# Altium PCB PCB2.PcbDoc
Units mm, origin at the board's own origin, x right, y up, seen from the top; angles counter-clockwise.
Board outline 84.6 x 40.6 mm, 2 copper layers (Top Layer, Bottom Layer), stack 1.571 mm thick; 85 components, 67 nets, 363 pads, 12 vias.
Unrouted connection lines stored in the file: 4.
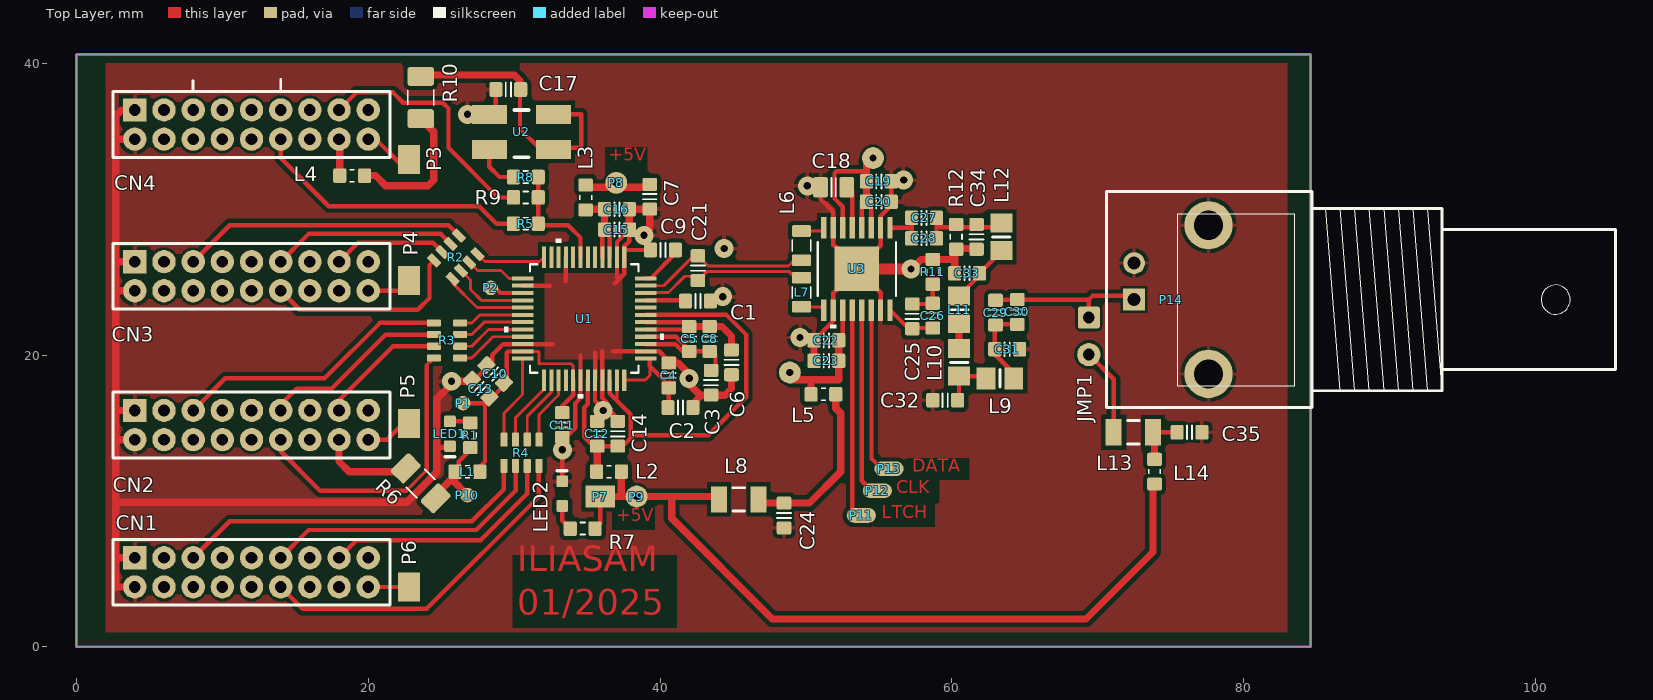
[diagram p0: Top Layer view]
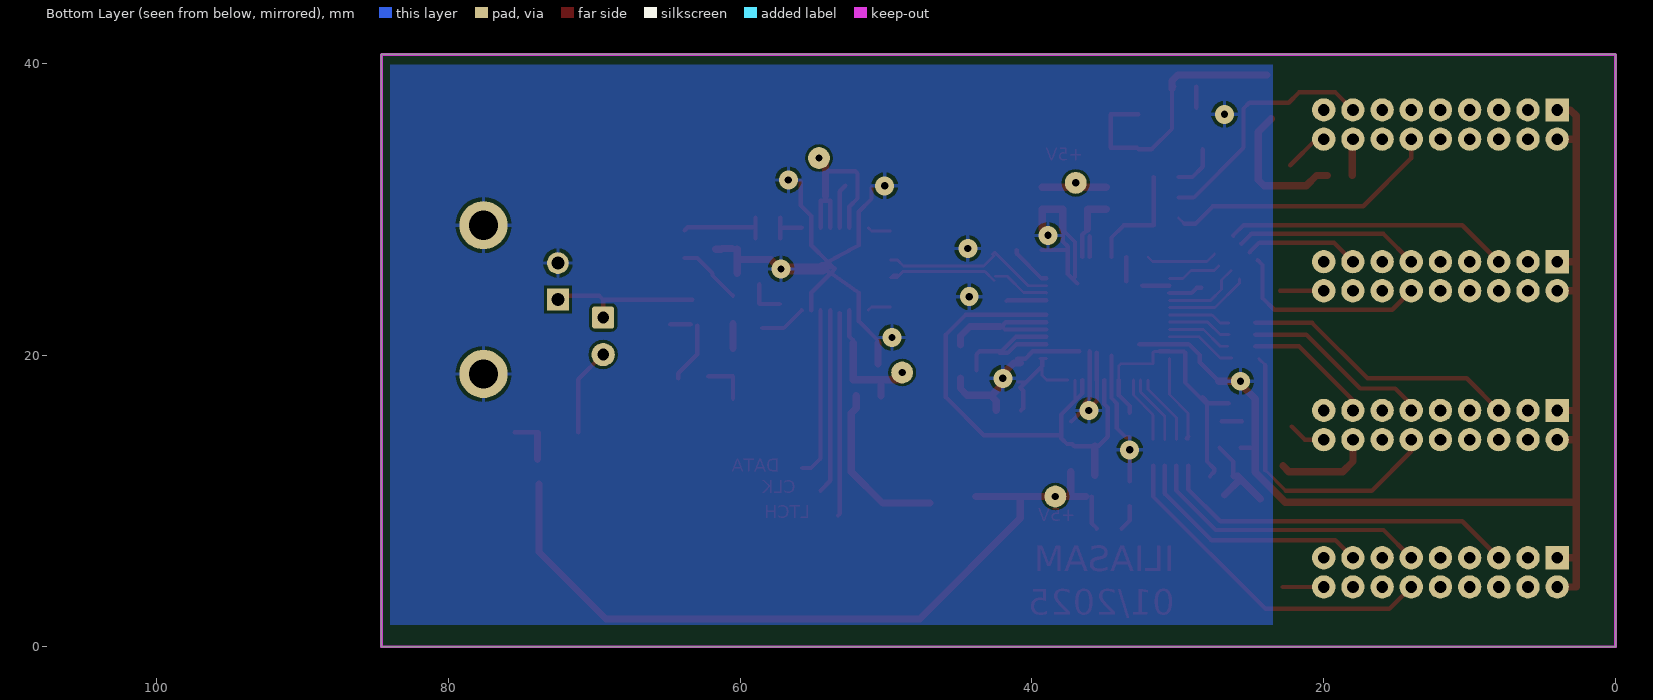
[diagram p1: Bottom Layer view, seen from below]
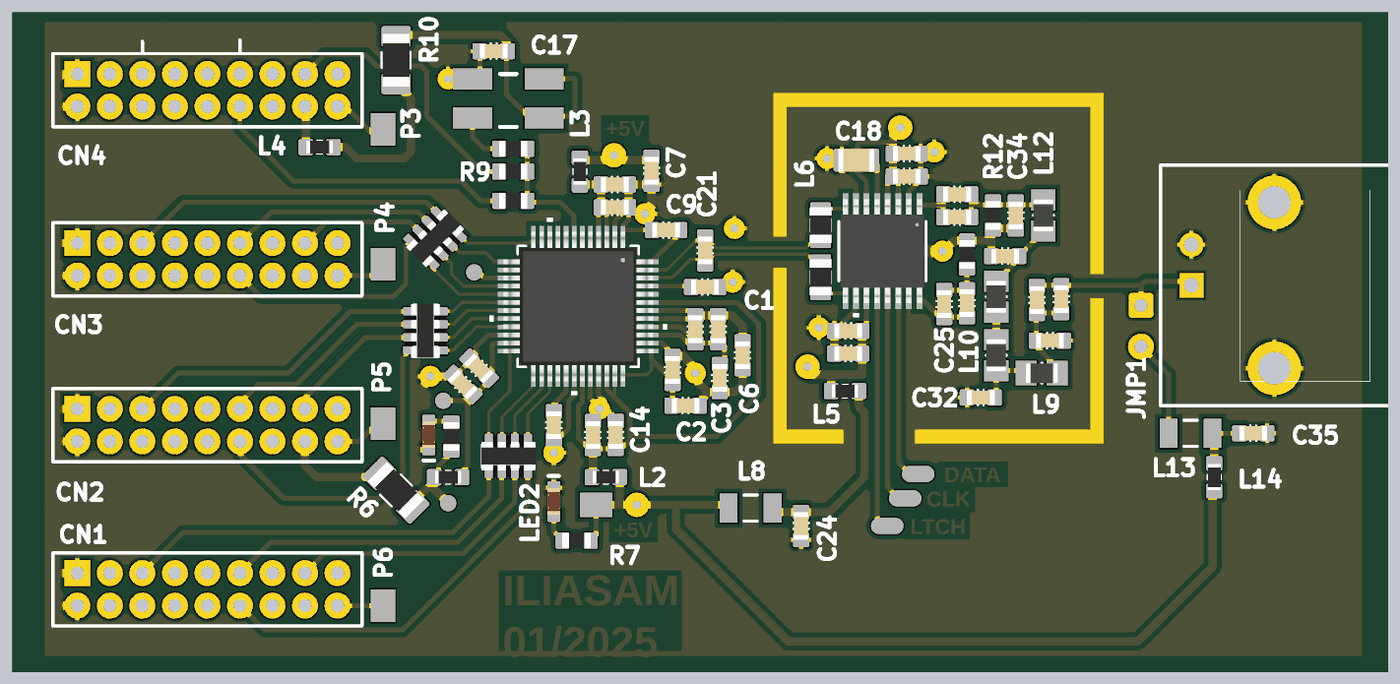
[diagram p2: 3D render of the assembled board from above, using the file's embedded part models]

## Layer stack, top to bottom
Top Solder: solder mask 0.0102, Solder Resist, Dk 3.5
Top Layer: signal copper 0.0356
Dielectric 1: dielectric 1.5, FR-4, Dk 4.8
Bottom Layer: signal copper 0.0356
Bottom Solder: solder mask 0.0102, Solder Resist, Dk 3.5

## Board outline
0,0 84.6,0 84.6,40.6 0,40.6

## Design rules (kind name [scope] priority, off if disabled: settings)
Clearance Clearance_1 [InNamedPolygon('GND3') vs OnLayer('Top Layer')] p1: gap=0.3
Clearance [All] p2: gap=0.19
HoleSize [All] p1: absolutevalues=TRUE maxlimit=5 minlimit=0.025 maxpercent=80.000 minpercent=20.000
PolygonConnect [All] p1: connectstyle=Relief reliefconductorwidth=0.254 reliefentries=4 polygonreliefangle="90 Angle" airgapwidth=0.254
RoomDefinition Sheet1 [InComponentClass('Sheet1')] p1: confinementstyle=ConfineIn formatcopy=TRUE lockcomponents=FALSE outline 125.643,-16.916 290.87,-16.916 290.87,89.129 125.643,89.129
RoutingVias [All] p1: holewidth=0.5 width=1.3 viastyle="Through Hole" minholewidth=0.5 minwidth=0.8 maxholewidth=1 maxwidth=5
SolderMaskExpansion [All] p1: expansion=0.102
Width [All] p1: maxlimit=1 minlimit=0.2 preferedwidth=0.3
29 further rules are at their usual default settings.

## Components (designator, comment, footprint, x,y, rotation, side; value= is the part's Value field where it differs from the comment)
C1 "100nF" CAPC1608X90N 42.6,23.7 r180 top
C2 "10uF" CAPC1608X90N 41.4,16.4 r180 top
C3 "100nF" CAPC1608X90N 43.5,18.1 r90 top
C4 "100nF" CAPC1608X90N 40.6,18.6 r270 top
C5 "10uF" CAPC1608X90N 42,21.1 r270 top
C6 "100nF" CAPC1608X90N 44.9,19.5 r90 top
C7 "100nF" CAPC1608X90N 39.3,30.85 r90 top
C8 "100nF" CAPC1608X90N 43.4,21.1 r270 top
C9 "100nF" CAPC1608X90N 40.2,27.2 r0 top
C10 "100nF" CAPC1608X90N 28.7,18.7 r315 top
C11 "100nF" CAPC1608X90N 33.3,15.2 r90 top
C12 "100nF" CAPC1608X90N 35.7,14.6 r270 top
C13 "10nF" CAPC1608X90N 27.7,17.7 r315 top
C14 "10uF" CAPC1608X90N 37.1,14.6 r270 top
C15 "10uF" CAPC1608X90N 37.05,28.6 r180 top
C16 "100nF" CAPC1608X90N 37.05,30 r180 top
C17 "100nF" CAPC1608X90N 29.6,38.2 r0 top
C18 "100nF" CAPC2012X135N 51.9,31.5 r0 top
C19 "100nF" CAPC1608X90N 55,31.9 r180 top
C20 "100pF" CAPC1608X90N 55,30.5 r180 top
C21 "100pF" CAPC1608X90N 42.6,25.95 r90 top
C22 "100pF" CAPC1608X90N 51.4,21 r0 top
C23 "100nF" CAPC1608X90N 51.4,19.6 r0 top
C24 "1uF" CAPC1608X90N 48.5,9 r90 top
C25 "470nF" CAPC1608X90N 57.3,22.65 r90 top
C26 "1nF" CAPC1608X90N 58.7,22.7 r90 top
C27 "1nF" CAPC1608X90N 58.1,29.4 r0 top
C28 "470nF" CAPC1608X90N 58.1,28 r0 top
C29 "470nF" CAPC1608X90N 63,22.9 r90 top
C30 "1nF" CAPC1608X90N 64.5,22.95 r90 top
C31 "56pF" CAPC1608X90N 63.8,20.4 r180 top
C32 "160pF" CAPC1608X90N 59.55,16.9 r0 top
C33 "160pF" CAPC1608X90N 61.05,25.6 r0 top
C34 "56pF" CAPC1608X90N 61.7,28.1 r90 top
C35 "100nF" CAPC1608X90N 76.3,14.7 r180 top
CN1 "S9_conn" CONN9_2 4,4.1 r0 top locked
CN2 "S9_conn" CONN9_2 4,14.2 r0 top locked
CN3 "S9_conn" CONN9_2 4,24.4 r0 top locked
CN4 "S9_conn" CONN9_2 4,34.8 r0 top locked
JMP1 "PLS-2" HDR_1x2 69.4,21.3 r0 top
L1 "BEAD" INDC1608N 26.8,12 r0 top
L2 "BEAD" INDC1608N 36.5,12 r180 top
L3 "BEAD" INDC1608N 34.9,30.8 r270 top
L4 "BEAD" INDC1608N 18.9,32.3 r0 top
L5 "BEAD" INDC1608N 51.2,17.3 r180 top
L6 "Inductor" RESC2012X70N 49.7,27.5 r270 top
L7 "Inductor" RESC2012X70N 49.7,24.3 r90 top
L8 "Inductor" INDC3216 45.4,10.1 r0 top
L9 "Inductor" V0805HD 63.3,18.4 r180 top
L10 "Inductor" V0805HD 60.5,19.5 r90 top
L11 "Inductor" V0805HD 60.5,23.1 r90 top
L12 "Inductor" V0805HD 63.4,28.1 r90 top
L13 "Inductor" INDC3216 72.45,14.7 r0 top
L14 "BEAD" INDC1608N 73.9,12 r90 top
LED1 "LED" LED_0603 25.6,14.6 r270 top
LED2 "LED" LED_0603 33.3,10.5 r90 top
P1 "Pad" EXT_PAD_SMALL2 26.5,18.2 r0 top
P2 "Pad" EXT_PAD_SMALL2 28.4,26.1 r0 top
P3 "Pad" EXT_PAD_2 22.8,31.9 r180 top
P4 "Pad" EXT_PAD_2 22.8,23.6 r180 top
P5 "Pad" EXT_PAD_2 22.8,13.8 r180 top
P6 "Pad" EXT_PAD_2 22.8,5.6 r0 top
P7 "Pad" Ext_pad_2 34.4,10.3 r90 top
P8 "Pad" Ext_hole 37,31.8 r0 top
P9 "Pad" Ext_hole 38.4,10.3 r0 top
P10 "Pad" Ext_pad_small2#1 26.8,11.9 r0 top
P11 "Pad" Ext_pad_small2#2 52.3,9 r90 top
P12 "Pad" Ext_pad_small2#2 53.4,10.7 r90 top
P13 "Pad" Ext_pad_small2#2 54.2,12.2 r90 top
P14 "BNC" "BNC_RA CON" 72.5,23.8 r180 top
R1 "2K" RESC1608X55N 27,14.5 r90 top
R2 "56" RESCAXS50P160X320X70-8N 26,26.7 r135 top
R3 "56" RESCAXS50P160X320X70-8N 25.4,21 r180 top
R4 "56" RESCAXS50P160X320X70-8N 30.5,13.3 r270 top
R5 "NA" RESC1608X55N 30.8,29 r180 top
R6 "0" RESC3216N_ZERO 23.6,11.2 r315 top
R7 "2K" RESC1608X55N 34.7,8.1 r0 top
R8 "NA" RESC1608X55N 30.8,32.2 r180 top
R9 "0" RESC1608X55N 30.8,30.8 r180 top
R10 "0" RESC3216N_ZERO 23.6,37.65 r90 top
R11 "33" RESC1608X55N 58.7,25.7 r90 top
R12 "66" RESC1608X55N 60.3,28.1 r270 top
U1 "AD9226ASTZ" ST_48_ADI 34.8,22.5 r270 top
U2 "Quartz" "SX-6 QUARTZ" 30.5,35.3 r180 top
U3 "AD8370AREZ" RE_16_2_ADI 53.5,25.9 r270 top

## Footprints (in the part's own frame and the unit in brackets; to place one, negate y for a bottom-side part, rotate by r counter-clockwise, add the part's x,y. Pads: shape width x height; smd on the part's side, far side on the other; paste and mask are expansions set on the pad)
"BNC_RA CON" [mm] "Connector; BNC Elbow"
  rect 1.5x1.5 hole 0.9: 1(0,0)
  round 3.3 hole 2: 2(-5.1,5.1) 2(-5.1,-5.1)
  round 1.5 hole 0.9: 2(0,-2.5)
  silkscreen extent -33,-7.4 1.9,7.4
CAPC1608X90N [mm] "Chip Capacitor, Body 1.6x0.8mm, EIA 0603, IPC Medium Density"
  round 0.254 on Mech15: 0(0,0)
  rrect25% 0.9x1 smd: 1(-0.85,0) 2(0.85,0)
  Top Layer pour cut-out: -0.6,0.5 -0.4,0.7 0.4,0.7 0.6,0.5 0.6,-0.5 0.4,-0.7 -0.4,-0.7 -0.6,-0.5
  silkscreen extent -0.18,-0.48 0.18,0.48, body extent -0.85,-0.45 0.85,0.45, height 0.89
CAPC2012X135N [mm] "Chip Capacitor, Body 2.0x1.2mm, EIA 0805, IPC Medium Density"
  round 0.254 on Mech15: 0(0,0)
  rrect25% 1x1.4 smd: 1(-0.9,0) 2(0.9,0)
  Top Layer pour cut-out: -0.675,0.7 -0.475,0.9 0.475,0.9 0.675,0.7 0.675,-0.7 0.475,-0.9 -0.475,-0.9 -0.675,-0.7
  silkscreen extent -0.15,-0.65 0.15,0.65, body extent -1.1,-0.72 1.1,0.73, height 1.34
CONN9_2 [mm] "Connector 9x2, 2mm"
  rect 1.6x1.6 hole 0.8: 1(0,2)
  round 1.6 hole 0.8: 2(0,0) 3(2,2) 4(2,0) 5(4,2) 6(4,0) 7(6,2) 8(6,0) 9(8,2) 10(8,0) 11(10,2) 12(10,0) 13(12,2) 14(12,0) 15(14,2) 16(14,0) 17(16,2) 18(16,0)
  silkscreen extent -1.5,-1.25 17.5,3.25
Ext_hole [mm] "Hole for wire (0.6)"
  round 1.5 hole 0.5: 1(0,0)
EXT_PAD_2 [mm] "Pad for wire(1.5x2)"
  rect 1.5x2 smd: 1(0,-1.5)
Ext_pad_2 [mm] "Pad for wire(1.5x2)"
  rect 1.5x2 smd: 1(0,-1.5)
EXT_PAD_SMALL2 [mm] "Pad for wire(1mm round)"
  round 1 smd: 1(0,-1.5)
Ext_pad_small2#1 [mm] "Pad for wire(1mm round)"
  round 1 smd: 1(0,-1.5)
Ext_pad_small2#2 [mm] "Pad for wire(1mm round)"
  oval 1x2 smd: 1(0,-1.5)
HDR_1x2 [mm]
  rrect25% 1.524x1.524 hole 0.8: 1(0,1.27)
  round 1.6 hole 0.8: 2(0,-1.27)
  body extent -0.5,-0.51 0.51,0.51
INDC1608N [mm] "Chip bead, Body 1.6x0.8mm, 0603, IPC Medium Density"
  round 0.254 on Mech15: 0(0,0)
  rrect25% 0.9x1 smd: 1(-0.85,0) 2(0.85,0)
  Top Layer pour cut-out: -0.4,0.6 0.4,0.6 0.4,-0.6 -0.4,-0.6
  silkscreen extent -0.15,-0.41 0.15,0.41, body extent -0.8,-0.4 0.8,0.4, height 0.79
INDC3216 [mm] "Chip Inductor, Body 3.2x1.6mm, IPC High Density"
  rect 1.1x1.8 smd: 1(-1.35,0) 2(1.35,0)
  silkscreen extent -0.4,-0.8 0.4,0.8, body extent -1.7,-0.9 1.7,0.9, height 0.55
LED_0603 [mm] "LED_0603"
  round 0.254 on Mech15: 0(0,0)
  rrect25% 0.8x0.8 smd: 1(-0.85,0) 2(0.85,0)
  Top Layer pour cut-out: -0.5,0.5 0.5,0.5 0.5,-0.5 -0.5,-0.5
  silkscreen extent 1.58,-0.3 1.58,0.33, body extent -0.8,-0.4 0.8,0.4, height 0.75
RE_16_2_ADI [mil]
  rect 58x14 smd paste+0 mask+0: 1(-111,89.57) 2(-111,63.98) 3(-111,38.39) 4(-111,12.8) 5(-111,-12.8) 6(-111,-38.39) 7(-111,-63.98) 8(-111,-89.57) 9(111,-89.57) 10(111,-63.98) 11(111,-38.39) 12(111,-12.8) 13(111,12.8) 14(111,38.39) 15(111,63.98) 16(111,89.57)
  rect 120x120 smd paste-59.5 mask+0: EPAD(0,0)
  silkscreen extent -72,-106 160,106, body extent -126,-101 126,101, height 47
RESC1608X55N [mm] "Chip Resistor, Body 1.6x0.8mm, EIA 0603, IPC Medium Density"
  round 0.254 on Mech15: 0(0,0)
  rrect25% 0.9x1 smd: 1(-0.85,0) 2(0.85,0)
  Top Layer pour cut-out: -0.6,0.5 -0.4,0.7 0.4,0.7 0.6,0.5 0.6,-0.5 0.4,-0.7 -0.4,-0.7 -0.6,-0.5
  silkscreen extent -0.15,-0.41 0.15,0.41, body extent -0.87,-0.47 0.88,0.48, height 0.54
RESC2012X70N [mm] "Chip Resistor, Body 2.0x1.2mm, EIA 0805, IPC Medium Density"
  round 0.254 on Mech15: 0(0,0)
  rrect25% 0.8x1.3 smd: 1(-1,0) 2(1,0)
  Top Layer pour cut-out: -0.725,0.65 -0.525,0.85 0.525,0.85 0.725,0.65 0.725,-0.65 0.525,-0.85 -0.525,-0.85 -0.725,-0.65
  silkscreen extent -0.38,-0.64 0.38,0.64, body extent -1.1,-0.67 1.1,0.68, height 0.69
RESC3216N_ZERO [mm] "Chip Resistor, Body 3.2x1.6mm, 1206, IPC Medium Density"
  round 0.508 on Mech15: 0(0,0)
  rrect25% 1.3x1.8 smd: 1(-1.45,0) 2(1.45,0)
  silkscreen extent -0.51,-0.89 0.51,0.89, body extent -1.62,-0.82 1.63,0.83, height 0.69
RESCAXS50P160X320X70-8N [mm] "Resistor Pack, Body 1.6x3.2mm, 4x0603, IPC Medium Density"
  round 0.254 on Mech15: 0(0,0)
  rrect25% 0.95x0.5 smd: 1(-0.9,1.2) 2(-0.9,0.4) 3(-0.9,-0.4) 4(-0.9,-1.2) 5(0.9,-1.2) 6(0.9,-0.4) 7(0.9,0.4) 8(0.9,1.2)
  Top Layer pour cut-out: -0.4,1.7 0.4,1.7 0.4,-1.7 -0.4,-1.7
  body extent -0.87,-1.68 0.88,1.67, height 0.7
ST_48_ADI [mil]
  rect 58x11 smd paste+0 mask+0: 1(-166,108.27) 2(-166,88.58) 3(-166,68.9) 4(-166,49.21) 5(-166,29.53) 6(-166,9.84) 7(-166,-9.84) 8(-166,-29.53) 9(-166,-49.21) 10(-166,-68.9) 11(-166,-88.58) 12(-166,-108.27) 25(166,-108.27) 26(166,-88.58) 27(166,-68.9) 28(166,-49.21) 29(166,-29.53) 30(166,-9.84) 31(166,9.84) 32(166,29.53) 33(166,49.21) 34(166,68.9) 35(166,88.58) 36(166,108.27)
  rect 11x58 smd paste+0 mask+0: 13(-108.27,-166) 14(-88.58,-166) 15(-68.9,-166) 16(-49.21,-166) 17(-29.53,-166) 18(-9.84,-166) 19(9.84,-166) 20(29.53,-166) 21(49.21,-166) 22(68.9,-166) 23(88.58,-166) 24(108.27,-166) 37(108.27,166) 38(88.58,166) 39(68.9,166) 40(49.21,166) 41(29.53,166) 42(9.84,166) 43(-9.84,166) 44(-29.53,166) 45(-49.21,166) 46(-68.9,166) 47(-88.58,166) 48(-108.27,166)
  silkscreen extent -215,-215 215,215, body extent -181,-181 181,181, height 63
"SX-6 QUARTZ" [mm] "Quartz_SX-6 (SMD06035C4)"
  rect 2.4x1.3 smd: 1(-2.2,-1.2) 2(2.2,-1.2) 3(2.2,1.2) 4(-2.2,1.2)
  Top Layer pour cut-out: -3.594,1.3 -3.594,1.994 -3.594,2.094 3.6,2.094 3.6,0.3 3.6,-2.1 3.1,-2.1 1.9,-2.1 -3.594,-2.1 -3.594,-2
  silkscreen extent -0.5,-1.5 0.5,1.75, body extent -3,-1.75 3,1.75, height 1.2
V0805HD [mm]
  rect 1.3x1.5 smd: 1(-0.95,0) 2(0.95,0)
  silkscreen extent 0,-0.6 0,0.6, body extent -1,-0.62 1,0.63, height 1.2

## Part data
C1 C2 C3 C4 C5 C6 C7 C8 C9 C10 C11 C12 C13 C14 C15 C16 C17 C18 C19 C20 C21 C22 C23 C24 C25 C26 C27 C28 C29 C30 C31 C32 C33 C34 C35: library part CC0805, "Chip capacitor"
JMP1: library part JMP2, "Jumper"
L1 L2 L3 L4 L5 L14: "Ferrit Bead"
LED1 LED2: library part LED_0603, "LED_0603"
P1 P2 P3 P4 P5 P6 P7 P8 P9 P10 P11 P12 P13: library part "Ext Pad", "Pad for wire"
P14: "BNC Elbow Connector"
R1 R5 R6 R7 R8 R9 R10 R11 R12: library part RC0805, "Chip resistor"
R2 R3 R4: library part res_array_inv, "SMT Resistor Array"
U1 U3: "No Description Available"
U2: library part "Quartz Osc", "Quartz Osc"

## Free pads (board coordinates)
  round 1.5 hole 0.5: 2(48.9,18.8) 3(54.6,33.5)

## Via types
v1: diameter 1.3, hole 0.5, Top Layer to Bottom Layer, 12 vias

## Nets (pads, with @x,y where several pads share a name; then routed paths per layer and width w, separated by ;. In a path a pad name is that pad's centre, name@x,y a point inside that pad or via, vN(x,y) a via of type N, cw(c..) or ccw(c..) an arc to the next point about the centre after c; other vN are vias at no path point)
ADC_CLK: R5.1 R8.1 R9.1 U1.7 | length 7.9
  Top Layer w0.2: R5.1@31.65,28.9 R5.1
  Top Layer w0.3: R5.1@31.65,28.9 33.7,28.9 34.55,28.05 U1.7 ; R5.1 R9.1 R8.1
AMP_IN: C27.2 C28.2 C34.2 L12.2 R12.1 | length 6.3
  Top Layer w0.3: C28.2 C27.2 ; 58.95,28.75 60.7,28.75 62.1,28.75 63.6,28.75 L12.2@63.8,28.55
AMP_VDD1: C19.2 C20.2 C22.2 C23.2 L5.2 pad.2 pad.3 U3.3 U3.4 U3.6 U3.11 | length 22.2
  Top Layer w0.3: C22.2 52.525,21.275 U3.11 ; U3.6 52.525,30.167 51.96,30.732 51.96,32.46 52.1,32.6 54.15,32.6 ; U3.4 53.825,30.575 54.475,30.575 U3.3
  Top Layer w0.5: pad.2@48.9,18.4 49,18.3 50.2,18.3 ; L5.2@50.35,17.2 50.35,18.15 50.2,18.3 ; C22.2@52.25,20.8 52.25,19.4 52.25,18.3 50.2,18.3 ; C20.2@54.15,30.9 C19.2 54.15,32.6 pad.3@54.15,33.3
ANT: C29.2 C30.2 JMP1.1 P14.1 | length 10.6
  Top Layer w0.3: C29.2@63.3,23.8 C30.2 69.4,23.8 ; JMP1.1 69.4,23.8 ; P14.1 72.25,24.05 69.65,24.05 69.4,23.8
CLCK: P12.1 U3.13 | length 12.7
  Top Layer w0.3: U3.13 53.825,11.375 P12.1@54.5,10.7
CLK_OUT: CN4.12 R5.2 | length 19.3
  Top Layer w0.2: R5.2@29.55,29 R5.2@29.95,29.4
  Top Layer w0.3: CN4.12 14,33.5 17.3,30.2 27.6,30.2 28.8,29 R5.2@29.55,29
CML: C1.2 U1.45 | length 2.8
  Top Layer w0.3: U1.45 41.7,23.75 C1.2
D0: CN3.5 R2.5 | length 19.5
  Top Layer w0.3: CN3.5 10.5,28.9 25.497,28.9 R2.5
D1: CN3.11 R2.6 | length 12.7
  Top Layer w0.3: CN3.11 15.9,28.3 24.966,28.3 R2.6
D2: CN3.15 R2.7 | length 7.9
  Top Layer w0.3: CN3.15 19.3,27.7 24.434,27.7 R2.7
D3: CN3.12 R2.8 | length 13.8
  Top Layer w0.3: CN3.12 15.3,23.1 23.4,23.1 24.2,23.9 24.2,26.173 R2.8
D4: CN2.5 R3.5 | length 19.2
  Top Layer w0.3: CN2.5 10.2,18.4 17,18.4 20.8,22.2 R3.5@24.7,22.2
D5: CN2.11 R3.6 | length 13.1
  Top Layer w0.3: CN2.11 14,16.6 15.1,17.7 17.5,17.7 21.2,21.4 R3.6@24.7,21.4
D6: CN2.15 R3.7 | length 8.9
  Top Layer w0.2: CN2.15 CN2.15@18,16.9
  Top Layer w0.3: CN2.15@18,16.9 21.7,20.6 R3.7@24.7,20.6
D7: CN2.12 R3.8 | length 20.3
  Top Layer w0.2: CN2.12@14,13.4 CN2.12 ; 22.6,10.7 24,12.1 ; 24,19.3 R3.8@24.45,19.75
  Top Layer w0.3: CN2.12@14,13.4 16.7,10.7 22.6,10.7 ; 24,12.1 24,19.3
D8: CN1.5 R4.5 | length 24.8
  Top Layer w0.3: CN1.5 10.5,8.6 27.1,8.6 29.3,10.8 R4.5
D9: CN1.11 R4.6 | length 19.7
  Top Layer w0.3: CN1.11 15.9,8 27.4,8 30.1,10.7 R4.6
D10: CN1.15 R4.7 | length 16.6
  Top Layer w0.3: CN1.15 19.2,7.3 27.7,7.3 30.9,10.5 R4.7
D11: CN1.12 R4.8 | length 23.6
  Top Layer w0.3: CN1.12 15.5,2.6 24,2.6 31.7,10.3 R4.8
DATA: P13.1 U3.14 | length 11.7
  Top Layer w0.3: U3.14@54.5,23.081 54.5,12.9 55.15,12.25 P13.1@55.75,12.25
FPGA_CLK: CN4.15 R9.2 | length 17
  Top Layer w0.3: CN4.15 19.2,38 21.7,38 22.4,37.3 25.1,37.3 25.5,36.9 25.5,34.2 28.9,30.8 R9.2
GND: C1.1 C2.1 C3.1 C4.1 C6.1 C7.1 C9.1 C10.1 C11.1 C12.1 C13.1 C14.1 C15.1 C16.1 C17.1 C18.1 C19.1 C20.1 C22.1 C23.1 C24.1 C31.1 C32.1 C33.1 C34.1 C35.1 CN1.1 CN1.2 CN2.1 CN2.2 CN3.1 CN3.2 CN4.1 CN4.2 LED1.2 LED2.2 P14.2 R11.2 R12.2 U1.1 U1.2 U1.9 U1.14 U1.22 U1.30 U1.32 U1.33 U1.38 U2.2 U3.2 U3.7 U3.10 U3.15 U3.EPAD | length 168.3
  Top Layer w0.3: 24.75,13.65 LED1.2@25.7,13.65 ; v1@25.499,17.799 25.299,17.799 v1(25.7,18.2) ; C13.1@27.198,18.2 28.5,19.502 28.5,20 29.25,20.75 U1.22 32.65,20.75 ; U2.2@28.75,36.95 C17.1@28.75,38.4 ; U1.14 32.45,24.75 ; LED2.2 v1(33.3,13.5) ; C11.1 33.55,14.35 34.2,15 34.2,16.7 34.55,17.05 U1.30 34.55,19.95 ; 33.55,25.05 U1.9 ; 35.55,20.15 U1.32 35.54,18.274 35.54,16.86 36.2,16.2 v1(36.1,16.2) ; 36.05,20.25 U1.33 36.05,17.05 36.4,16.7 v1@36.4,16.5 ; 36.75,20.25 U1.38 39.95,20.25 40.45,19.75 C4.1@41,19.75 ; 36.9,24.9 37.55,25.55 U1.1 37.55,27.45 37.9,27.8 C15.1 37.05,27.75 U1.2 37.05,25.35 ; C14.1@37.3,15.45 36.6,16.15 v1@36.6,16.3 ; 37.734,27.2 C9.1 ; C22.1 51.875,22.325 U3.10 51.875,24.275 53.732,25.566 U3.EPAD@53.792,25.608 ; C18.1 51,30.7 51.875,29.825 U3.7 51.875,27.525 53.811,26.474 U3.EPAD@53.981,26.381 ; U3.EPAD U3.EPAD@53.792,25.608 ; U3.EPAD@54.3,26 53.6,26 U3.EPAD@53.981,26.381 ; U3.15 55.125,24.275 U3.EPAD@53.792,25.608 ; C19.1 55.85,30.25 55.125,29.525 U3.2 55.125,27.525 U3.EPAD@53.981,26.381 ; v1(36.1,16.2) v1@36.4,16.5 ; v1(36.1,16.2) 36.5,16.2 v1@36.6,16.3 ; v1@36.4,16.5 v1@36.6,16.3 ; U3.EPAD@53.792,25.608 54.356,26 54.5,26.1 U3.EPAD@53.981,26.381
  Top Layer w0.5: 2.8,9.9 22.634,9.9 24.7,11.966 24.7,17 v1@25.499,17.799 ; 2.8,16.2 CN2.1 ; 2.8,24.4 CN3.2 ; 2.9,6.1 CN1.1 ; CN1.2 2.7,4.1 2.7,14.2 ; CN2.2 2.7,14.2 ; CN3.1 2.7,26.4 ; CN4.2 2.7,34.8 ; CN4.1 3.1,36.8 2.7,36.4 2.7,34.8 ; v1(25.7,18.2) C13.1@27.198,18.2 ; C15.1 C16.1 C7.1 39.3,28.6 v1(38.9,28.2) ; C4.1@40.8,19.45 41.25,19.45 42.1,18.6 41.9,18.6 42,18.5 v1(42,18.4) 42,18 42.75,17.25 C3.1 ; C2.1@42.45,16.2 42.45,16.85 42.85,17.25 C3.1 ; C6.1@44.9,18.4 44.9,17.7 44.45,17.25 C3.1 ; C23.1@50.55,19.4 C22.1@50.55,20.8 ; v1@57.25,25.85 57.2,25.85 57.9,26.55 R11.2 60.2,26.55 ; C33.1 60.2,26.55 ; R12.2@60.2,27.25 60.2,26.55 ; R12.2@60.55,27.3 61.25,27.3 61.3,27.25 C34.1 ; 2.7,14.2 2.7,26.4 ; 2.7,26.4 2.7,34.8
  Top Layer w0.75: U3.EPAD@54.3,26 U3.EPAD@54.356,26 ; U3.EPAD@54.356,25.9 v1(57.2,25.9)
  other v1: 49.6,21.2 44.3,24 44.4,27.3 50.1,31.6 56.7,32 26.8,36.5
NetC3_2: C3.2 C5.2 C8.2 U1.39 U1.40 | length 9.9
  Top Layer w0.3: U1.39 41.05,20.75 41.65,20.15 42.2,20.15 41.1,21.25 U1.40 ; C5.2@42.2,20.25 43.6,20.25 43.8,20.05 C3.2@43.8,18.95
NetC5_1: C5.1 C6.2 C8.1 U1.41 U1.42 | length 10.1
  Top Layer w0.3: U1.41 41.85,21.75 C5.1@42.075,21.975 ; U1.42 41.8,22.25 C5.1@42.075,21.975 ; C5.1@42.2,21.85 C5.1@42.075,21.975
  Top Layer w0.5: C5.1@42.2,21.95 44.25,21.95 44.9,21.3 C6.2@44.9,20.7
NetC18_2: C18.2 U3.5 | length 3
  Top Layer w0.3: C18.2@52.8,31.6 53.175,31.225 U3.5
NetC24_2: C24.2 L5.1 L8.2 | length 11.6
  Top Layer w0.5: L8.2@47,9.85 C24.2 50.25,9.85 52.4,12 52.4,16 ; L5.1@52.05,17.2 52.05,16.35 52.35,16.05
NetC25_1: C25.1 C26.1 U3.16 | length 3.2
  Top Layer w0.3: U3.16 57.006,21.85 C26.1@58.5,21.85
NetC25_2: C25.2 C26.2 R11.1 | length 2.7
  Top Layer w0.3: C25.2 58.65,23.5 C26.2 R11.1
NetC27_1: C27.1 C28.1 U3.1 | length 2.8
  Top Layer w0.3: U3.1 57.2,28.719 ; C28.1 C27.1
NetC29_1: C29.1 C30.1 C31.2 L9.1 | length 5.5
  Top Layer w0.3: C29.1@62.95,22 C31.2 62.95,20.05 64.25,18.75 L9.1 ; C29.1@63.4,22.1 C30.1@64.8,22.1
NetC32_2: C32.2 L9.2 L10.1 | length 3.2
  Top Layer w0.3: C32.2@60.5,17 L10.1 L9.2@62.2,18.55
NetC33_2: C33.2 L11.2 L12.1 | length 5.9
  Top Layer w0.3: L11.2 61.9,25.45 C33.2 ; L12.1@63.8,26.65 L12.1@62.95,26.65 ; C33.2 L12.1@62.95,26.65 ; C33.2 L12.1@62.95,26.65
NetC35_2: C35.2 L13.2 L14.2 | length 3.4
  Top Layer w0.3: L13.2 C35.2
  Top Layer w0.5: L14.2 L13.2@73.9,14.6
NetCN1_18: CN1.18 P6.1 | length 2.8
  Top Layer w0.3: CN1.18 P6.1
NetCN2_18: CN2.18 P5.1 | length 2.6
  Top Layer w0.3: CN2.18 21.3,14.2 P5.1@22.2,15.1
NetCN3_18: CN3.18 P4.1 | length 3
  Top Layer w0.3: CN3.18 P4.1@23,24.4
NetCN4_18: CN4.18 P3.1 | length 3
  Top Layer w0.3: CN4.18 20.5,34.8 P3.1@22.3,33
NetJMP1_2: JMP1.2 L13.1 | length 6
  Top Layer w0.3: JMP1.2 71.1,18.33 L13.1
NetL6_1: L6.1 U3.8 | length 1.6
  Top Layer w0.2: L6.1 51.006,28.5 U3.8
NetL7_1: L7.1 U3.9 | length 1.6
  Top Layer w0.2: L7.1 51.006,23.3 U3.9
NetL10_2: L10.2 L11.1 | length 1.7
  Top Layer w0.5: L10.2 L11.1
NetLED1_1: LED1.1 R1.2 | length 1.4
  Top Layer w0.3: LED1.1 R1.2@27,15.45
NetLED2_1: LED2.1 R7.1 | length 1.8
  Top Layer w0.3: LED2.1 33.3,8.65 R7.1
NetP11_1: P11.1 U3.12 | length 13.9
  Top Layer w0.3: U3.12@53.175,22.881 53.175,9.125 P11.1@53.3,9
NetR2_1: R2.1 U1.17 | length 5.8
  Top Layer w0.2: R2.1 25.788,24.912 27.45,23.25 U1.17
NetR2_2: R2.2 U1.16 | length 5.4
  Top Layer w0.2: R2.2 27,25.134 27,24.5 27.75,23.75 U1.16
NetR2_3: R2.3 U1.13 | length 3.7
  Top Layer w0.2: R2.3@27.2,26.1 27.5,25.8 29.1,25.8 29.65,25.25 U1.13
NetR2_4: R2.4 U1.12 | length 4.9
  Top Layer w0.2: R2.4 27.997,26.4 31.734,26.4 U1.12
NetR3_1: R3.1 U1.21 | length 4.9
  Top Layer w0.2: R3.1 27.1,19.8 28.55,21.25 U1.21
NetR3_2: R3.2 U1.20 | length 4.5
  Top Layer w0.2: R3.2@26.6,20.6 27.1,20.6 28.25,21.75 U1.20
NetR3_3: R3.3 U1.19 | length 4.4
  Top Layer w0.2: R3.3@26.5,21.4 27.1,21.4 27.95,22.25 U1.19
NetR3_4: R3.4 U1.18 | length 4.3
  Top Layer w0.2: R3.4@26.5,22.2 27.1,22.2 27.65,22.75 U1.18
NetR4_1: R4.1 U1.27 | length 4.6
  Top Layer w0.2: R4.1 31.7,15.9 33.05,17.25 U1.27
NetR4_2: R4.2 U1.26 | length 4.8
  Top Layer w0.2: R4.2 30.9,15.8 32.55,17.45 U1.26
NetR4_3: R4.3 U1.25 | length 4.9
  Top Layer w0.2: R4.3 30.1,15.7 32.05,17.65 U1.25
NetR4_4: R4.4 U1.24 | length 6.2
  Top Layer w0.2: R4.4 29.3,14.4 29.3,16 30.584,17.284 U1.24
  Top Layer w0.3: R4.4@29.3,14.4 R4.4@29.4,14.3
OSC_OUT: R8.2 U2.3 | length 3.1
  Top Layer w0.3: U2.3 28.3,32.9 29,32.2 R8.2
VCC_5V: C12.2 C14.2 C15.2 C16.2 L2.2 L3.2 U1.3 U1.4 U1.31 U1.34 U1.35 U1.43 | length 42.6
  Top Layer w0.2: 37.05,16.865 U1.35
  Top Layer w0.3: U1.31 35.04,18.274 35.04,16.64 34.8,16.4 34.8,14.4 35.45,13.75 C14.2 37.25,13.9 37.6,13.9 38,14.3 38,15.915 37.05,16.865 36.55,17.365 U1.34 ; U1.4 C15.2@36.05,28.15 ; C15.2 36.55,28.25 U1.3 ; 38,14.5 43.3,14.5 45.9,17.1 45.9,21.4 44.55,22.75 U1.43
  Top Layer w0.5: L3.2@34.9,30 C16.2 C15.2 ; L2.2@35.7,11.75 C12.2
VDD_3V: C10.2 C11.2 C13.2 L1.2 P1.1 P2.1 U1.15 U1.23 U1.29 | length 22.7
  Top Layer w0.2: U1.23@31.25,20.25 31.65,20.25 31.7,20.2 31.7,19.4 33.9,19.4 34.05,19.25 U1.29
  Top Layer w0.3: P1.1 27.902,16.7 C13.2 ; L1.2@27.8,11.7 27.5,12 27.5,12.2 28.001,12.701 28.001,16.599 27.999,16.599 29.507,18.107 29.507,20.164 29.583,20.24 30.574,20.24 U1.23 U1.23@31.25,20.25 ; P2.1 28.7,24.6 29.05,24.25 U1.15 ; C11.2 33.3,16.5 34.05,17.25 U1.29
VDD_3V_D: CN2.16 L1.1 P10.1 R1.1 R6.1 R6.2 | length 12.9
  Top Layer w0.3: L1.1@26.2,11.9 26.2,12.7 R1.1@27.15,13.65
  Top Layer w0.5: CN2.16 18,12.7 18.7,12 22.4,12 R6.1@22.8,12.4 ; R6.2@24.35,10.15 25.65,11.45 ; L1.1@26.151,11.7 25.9,11.7 25.65,11.45 ; P10.1 25.75,11.45 25.65,11.45
VDD_3V_D2: CN4.16 L4.1 | length 2.5
  Top Layer w0.2: CN4.16 CN4.16@18.05,34.75
  Top Layer w0.5: L4.1 CN4.16@18.05,34.75
VDD_3V_OSC: C17.2 L4.2 R10.1 R10.2 U2.1 U2.4 | length 29
  Top Layer w0.3: C17.2@30.25,38.4 30.4,38.25 30.4,35.5 31.8,34.1 U2.4 32.8,34.2 34.6,34.2 34.6,36.5 U2.1
  Top Layer w0.5: L4.2 20.5,32.3 21.2,31.6 24.1,31.6 24.5,32 24.5,35.3 R10.1 ; R10.2@23.9,39.2 30,39.2 30.4,38.8 C17.2@30.4,38.25
VIN: C7.2 L2.1 L3.1 L8.1 L14.1 P7.1 P8.1 P9.1 R7.2 | length 59.9
  Top Layer w0.3: R7.2 35.9,8.45 P7.1
  Top Layer w0.5: L3.1@34.9,31.5 C7.2@39.3,31.5 ; P7.1@36.3,10.3 P9.1 40.8,10.3 ; 37.35,10.35 L2.1 ; L8.1@43.85,10.3 40.8,10.3 ; L14.1@73.8,11.15 73.8,6.5 69.2,1.9 47.7,1.9 40.8,8.8 40.8,10.3
VINA: C21.1 L7.2 U1.46 | length 12.2
  Top Layer w0.2: U1.46 39.016,24.29 40.59,24.29 41.7,25.4 C21.1@42.5,25.4 ; C21.1 43.21,25.71 48.862,25.71 49.272,25.3 L7.2 49.5,25.5 49.252,25.5 L7.2@49.162,25.41
VINB: C21.2 L6.2 U1.47 | length 12.3
  Top Layer w0.2: U1.47 40.25,24.75 42.55,27.05 C21.2@42.7,26.9 ; C21.2 43.3,26.1 48.798,26.1 49.198,26.5 L6.2
VR: C9.2 U1.48 | length 3
  Top Layer w0.3: U1.48 39.35,25.25 41.05,26.95 C9.2
VREF_1V: C2.2 C4.2 U1.36 U1.37 | length 7.8
  Top Layer w0.2: U1.36 37.566,18.3 39,18.3 39.3,18.6 39.3,19.25 ; U1.37 U1.37@39.45,19.75 ; C4.2@40.35,18.15 40.4,18.15 C4.2@41,18.15
  Top Layer w0.3: 39.3,19.6 39.3,19.25 40.4,18.15 40.8,17.75 40.6,17.55 40.6,16.35 C2.2@40.75,16.2
pads on no net: C1.0 C2.0 C3.0 C4.0 C5.0 C6.0 C7.0 C8.0 C9.0 C10.0 C11.0 C12.0 C13.0 C14.0 C15.0 C16.0 C17.0 C18.0 C19.0 C20.0 C21.0 C22.0 C23.0 C24.0 C25.0 C26.0 C27.0 C28.0 C29.0 C30.0 C31.0 C32.0 C33.0 C34.0 C35.0 CN1.3 CN1.4 CN1.6 CN1.7 CN1.8 CN1.9 CN1.10 CN1.13 CN1.14 CN1.16 CN1.17 CN2.3 CN2.4 CN2.6 CN2.7 CN2.8 CN2.9 CN2.10 CN2.13 CN2.14 CN2.17 CN3.3 CN3.4 CN3.6 CN3.7 CN3.8 CN3.9 CN3.10 CN3.13 CN3.14 CN3.16 CN3.17 CN4.3 CN4.4 CN4.5 CN4.6 CN4.7 CN4.8 CN4.9 CN4.10 CN4.11 CN4.13 CN4.14 CN4.17 L1.0 L2.0 L3.0 L4.0 L5.0 L6.0 L7.0 L14.0 LED1.0 LED2.0 R1.0 R2.0 R3.0 R4.0 R5.0 R6.0 R7.0 R8.0 R9.0 R10.0 R11.0 R12.0 U1.5 U1.6 U1.8 U1.10 U1.11 U1.28 U1.44

## Polygon pours and split planes (outlines as drawn)
GND on Top Layer "GND1" (solid, pour order 8): 32.1,25.6 37.3,25.6 37.4,25.5 37.4,19.7 32.1,19.7
GND on Top Layer "GND3" (solid, remove dead copper, pour order 12): 2,40 2,1 83,1 83,40
GND on Bottom Layer "GND2" (solid, remove dead copper, pour order 10): 23.5,39.9 23.5,1.5 84,1.5 84,39.9

## Keep-outs
Keep-Out Layer:
  the board outline again, w0.2

## Other copper
Top Layer:
  text "+5V" at 36.5,33 h1.5
  text "DATA" at 57.3,11.7 h1.5
  text "CLK" at 56.2,10.2 h1.5
  text "LTCH" at 55.2,8.5 h1.5
  text "+5V" at 37,8.3 h1.5
  text "ILIASAM / 01/2025" at 30.2,1.6 h3

## Silkscreen, mask and mechanical layers (free items; w line width, h text height)
Top Overlay:
  lines w0.2: 8,38.05 8,38.8 ; 14,38.05 14,38.9
Top Solder:
  region: 66.3,23 66.3,14.35 67.1,14.35 67.1,23
  region: 46.8,35.6 46.8,26.8 47.6,26.8 47.6,35.6
  region: 67.1,14.925 55.5,14.925 55.5,14.075 67.1,14.075
  region: 51.1,14.925 46.8,14.925 46.8,14.075 51.1,14.075
  region: 46.8,24.9 46.8,14.9 47.6,14.9 47.6,24.9
  region: 67.1,35.625 46.8,35.625 46.8,34.775 67.1,34.775
  region: 66.3,35.4 66.3,24.5 67.1,24.5 67.1,35.4

## Text inside footprints (layer, text, board x,y; h text height)
U1: Mechanical 13 "*" at 37.165,26.031 h1.27 r270
U3: Mechanical 13 "*" at 54.706,28.084 h1.27 r270